# Altium PCB PCB1.PcbDoc
Units mil, origin at the board's own origin, x right, y up, seen from the top; angles counter-clockwise.
Board outline 2362.2 x 1574.8 mil, 2 copper layers (Top Layer, Bottom Layer); 17 components, 8 nets, 37 pads, 0 vias.
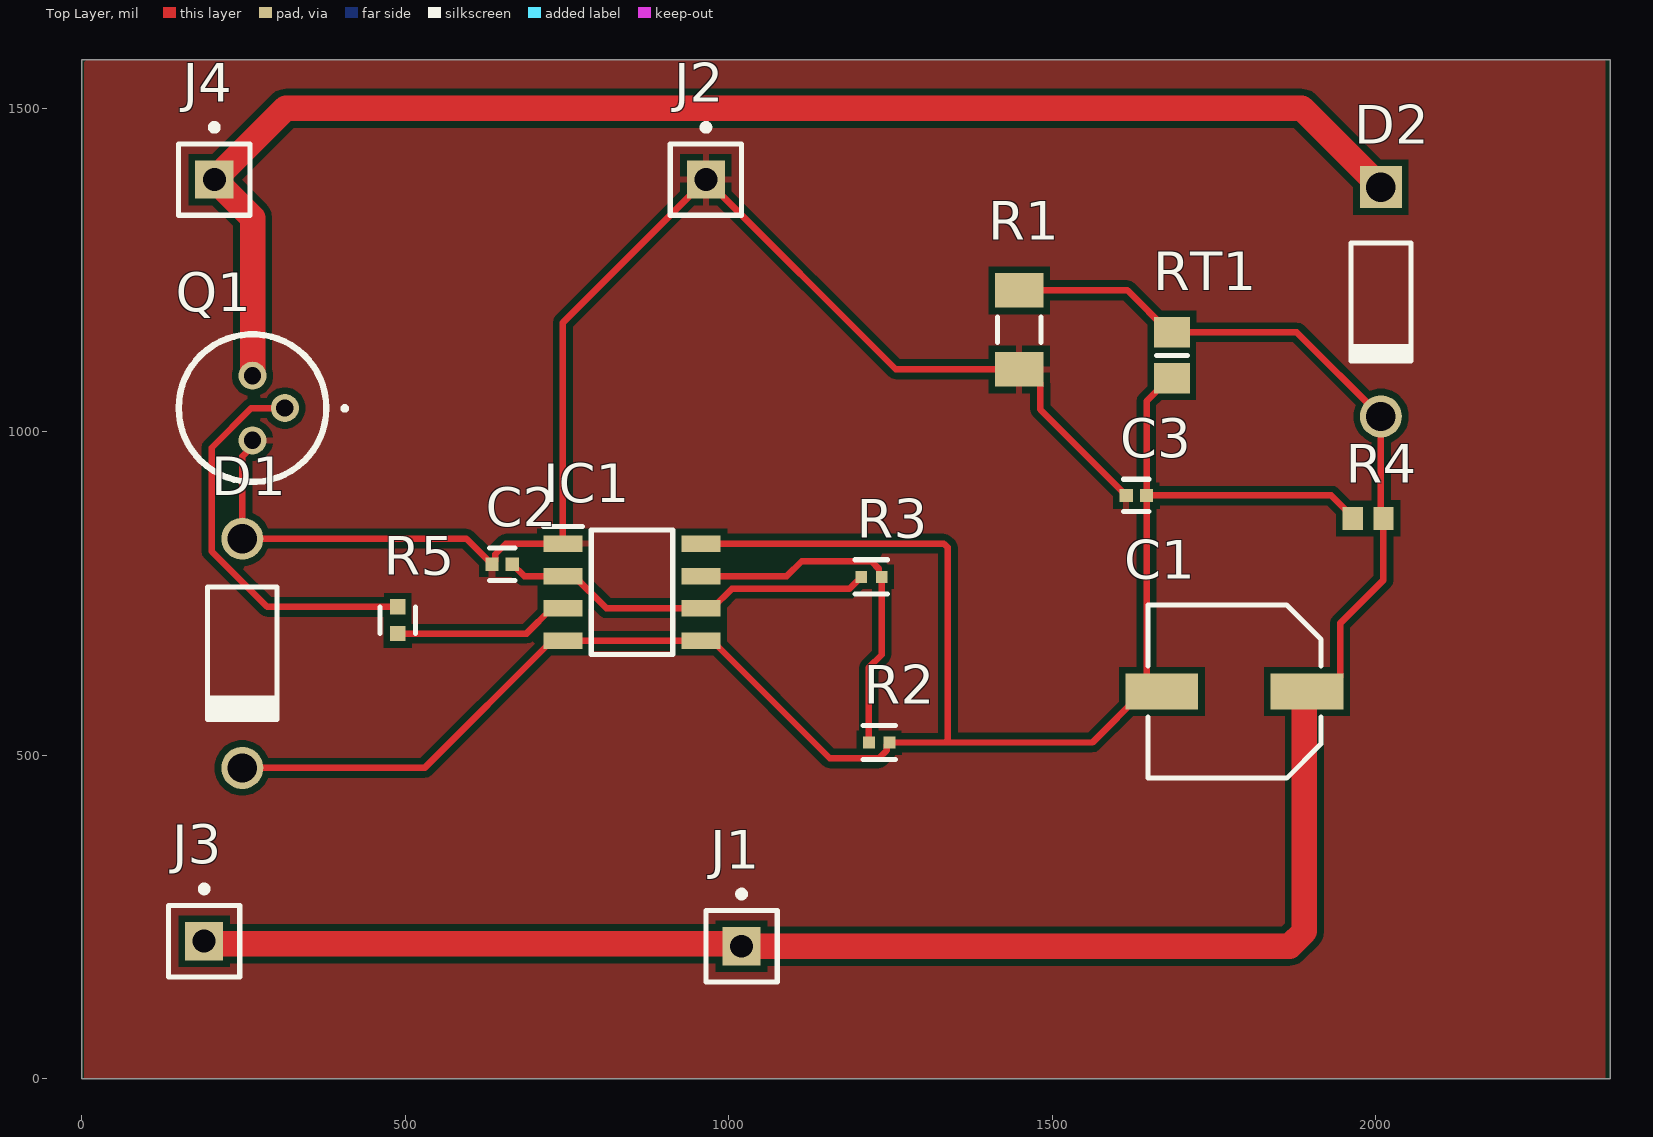
[diagram p0: Top Layer view]
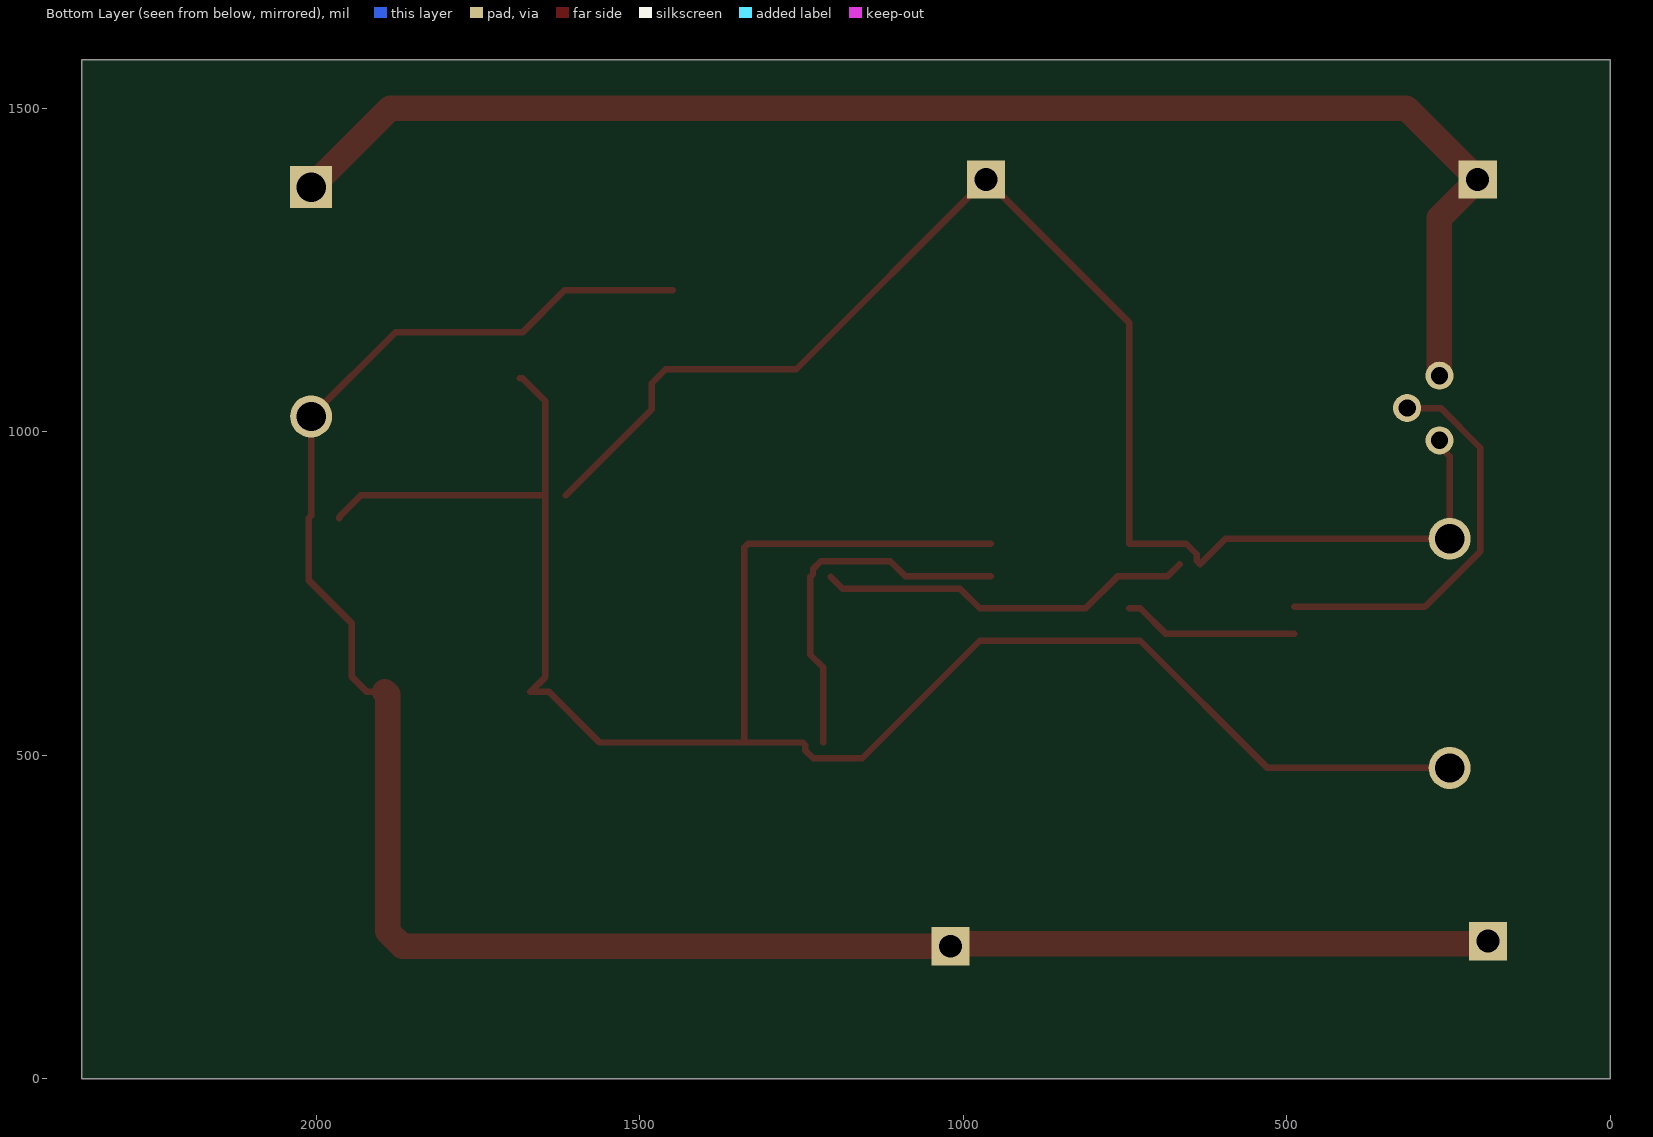
[diagram p1: Bottom Layer view, seen from below]
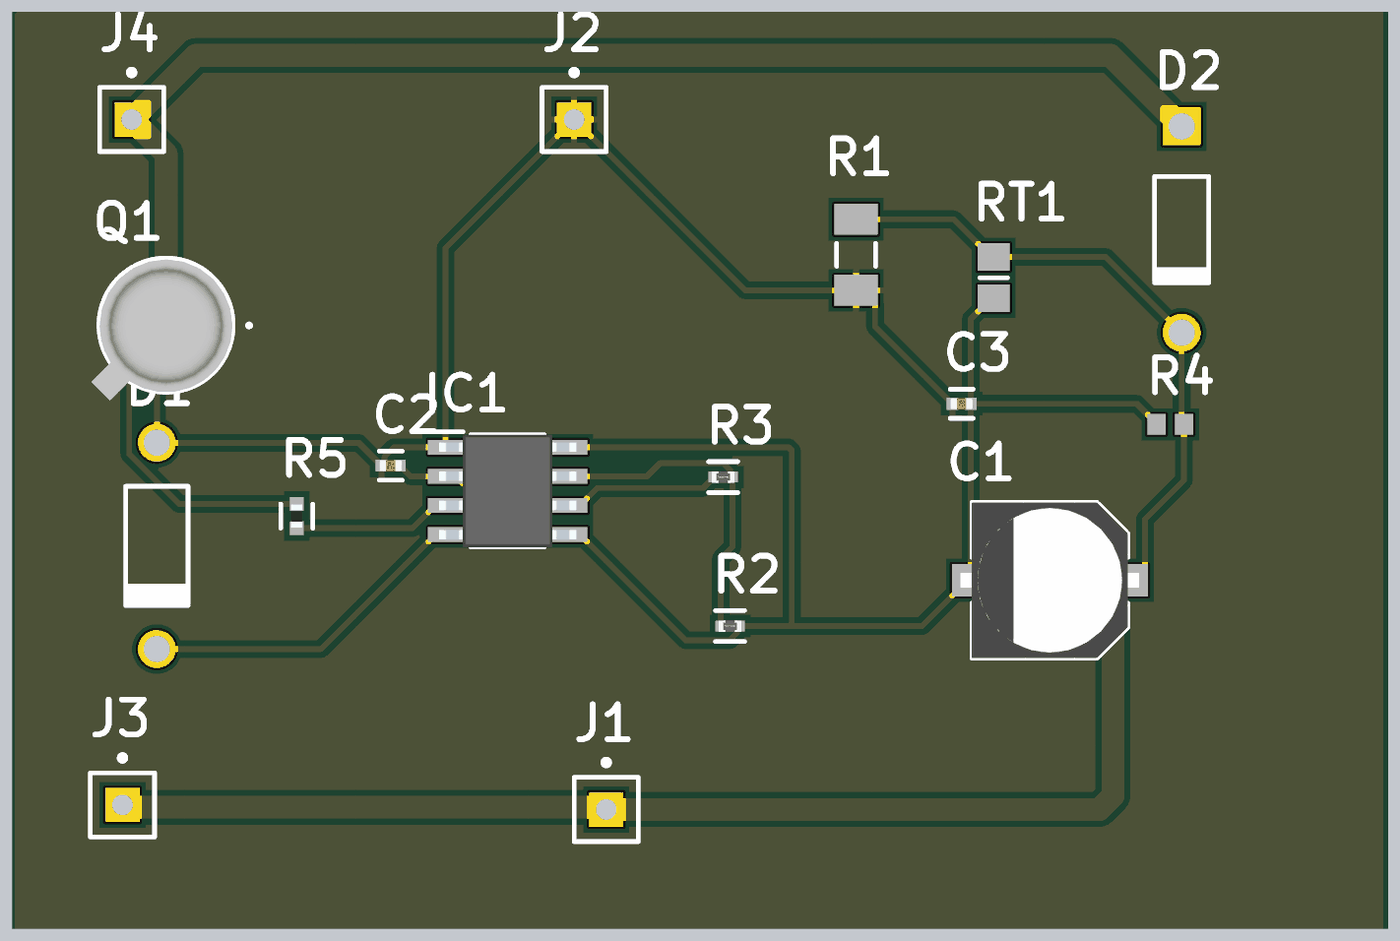
[diagram p2: 3D render of the assembled board from above, using the file's embedded part models]

## Layer stack, top to bottom
Top Solder: solder mask 0.4, Solder Resist, Dk 3.5
Top Layer: signal copper 1.4
Dielectric 1: dielectric 12.6, FR-4, Dk 4.8
Bottom Layer: signal copper 1.4
Bottom Solder: solder mask 0.4, Solder Resist, Dk 3.5

## Board outline
0,0 0,1574.8 2362.2,1574.8 2362.2,0

## Design rules (kind name [scope] priority, off if disabled: settings)
Clearance [All] p1: gap=10 ignorepadtopadclearanceinfootprint=FALSE except(0: Arc-Hole Track-Hole SMDPad-Hole THPad-Hole Via-Hole Fill-Hole Poly-Hole Region-Hole Text-Hole)
PolygonConnect [All] p1: connectstyle=Relief reliefconductorwidth=10 reliefentries=4 polygonreliefangle="90 Angle" airgapwidth=10
RoutingVias [All] p1: holewidth=23.62 width=39.37 viastyle="Through Hole" minholewidth=15.75 minwidth=27.56 maxholewidth=28 maxwidth=50
SolderMaskExpansion [All] p1: expansion=4 istentingtop=FALSE
Width [All] p1: maxlimit=39.37 minlimit=3.94 preferedwidth=10 minimp=50.000000 maximp=50.000000 favimp=50.000000
30 further rules are at their usual default settings.

## Components (designator, comment, footprint, x,y, rotation, side; value= is the part's Value field where it differs from the comment)
C1 "EEEFK1C101P" PNSC-EEEFK1C101P_L 1781.5,598.43 r180 top
C2 "C0402C473K4RACTU" FP-C0402-BB-MFG 649.61,795.28 r180 top value="47,000 pF"
C3 "C0402C473K4RACTU" FP-C0402-BB-MFG 1629.92,901.57 r180 top value="47,000 pF"
D1 "1N4739A" FAIR-DO-41-2_V 248.03,657.48 r270 top
D2 "1N4001-T" DIOD-DO-41-P-2_V 2007.87,1200.79 r270 top
IC1 "NE555D" SOIC127P600X175-8N 850.39,751.97 r0 top
J1 "Socket" PIN1 1019.69,204.72 r0 top
J2 "Socket" PIN1 964.57,1389.76 r0 top
J3 "Socket" PIN1 188.98,212.6 r0 top
J4 "Socket" PIN1 204.72,1389.76 r0 top
Q1 "2N2222A" TO-18_4 263.78,1036.61 r0 top
R1 "27K 1% 1206(3216)" RESC1206(3216)_M 1448.82,1157.48 r90 top value="27000.00 Ohm"
R2 "ERJ-2RKF1003X" FP-ERJ2RK-IPC_C 1232.28,519.68 r0 top
R3 "ERJ-2RKF1003X" FP-ERJ2RK-IPC_C 1220.47,775.59 r0 top
R4 "ERA3AEB102V" RESC1608X55X30LL20T20 1988.19,866.14 r180 top
R5 "CRCW040210K0FKED" FP-CRCW0402-e3-MFG 488.19,708.66 r90 top
RT1 "317-1258-ND" 6-0805_N 1685.04,1118.11 r90 top

## Footprints (in the part's own frame and the unit in brackets; to place one, negate y for a bottom-side part, rotate by r counter-clockwise, add the part's x,y. Pads: shape width x height; smd on the part's side, far side on the other; paste and mask are expansions set on the pad)
6-0805_N [mm] "Chip Resistor, Body 2.0x1.2mm, IPC Medium Density"
  rect 1.2x1.4 smd: 1(-0.9,0) 2(0.9,0)
  silkscreen extent 0,-0.6 0,0.6, body extent -1.07,-0.7 1.07,0.7, height 0.7
DIOD-DO-41-P-2_V [mm] "2-Leads, Axial Lead, Body 4.635x2.36mm, Pin Spacing 9mm"
  rect 1.65x1.65 hole 1.15: 1(-4.5,0)
  round 1.65 hole 1.15: 2(4.5,0)
  silkscreen extent -2.32,-1.18 2.32,1.18, body extent -4.93,-1.18 4.93,1.18, height 2.35
FAIR-DO-41-2_V [mm] "2-Leads, Axial leaded, Body 2.72x5.2mm, Pin Spacing 9mm"
  round 1.65 hole 1.15: 1(-4.5,0) 2(4.5,0)
  silkscreen extent -2.6,-1.36 2.6,1.36, body extent -4.93,-1.36 4.93,1.36, height 2.71
FP-C0402-BB-MFG [mm]
  rect 0.52x0.52 smd paste+0 mask+0: 1(-0.4,0) 2(0.4,0)
  silkscreen extent -0.5,-0.64 0.5,0.64, body extent -0.8,-0.4 0.8,0.4, height 0.25
FP-CRCW0402-e3-MFG [mm]
  rect 0.6x0.6 smd paste+0 mask+0: 1(-0.525,0) 2(0.525,0)
  silkscreen extent -0.53,-0.7 0.53,0.7, body extent -0.92,-0.4 0.92,0.4, height 0.25
FP-ERJ2RK-IPC_C [mil]
  rect 18.43x18.6 smd paste+0 mask+0: 1(-15.83,0) 2(15.83,0)
  silkscreen extent -25,-27 25,27, body extent -29,-15 29,15, height 10
PIN1 [mm] "Connector; Plug"
  rect 1.5x1.5 hole 0.9: 1(0,0)
  silkscreen extent -1.4,-1.4 1.4,2.17
PNSC-EEEFK1C101P_L [mm] "Aluminum Electrolytic Capacitor, Body 6.8x6.8mm, IPC High Density"
  rect 2.85x1.4 smd: 1(-2.85,0) 2(2.85,0)
  silkscreen extent -3.4,-3.4 3.4,3.4, body extent -3.9,-3.4 3.9,3.4, height 6.3
RESC1206(3216)_M [mm] "Chip Resistor, Body 3.2x1.6mm, IPC Low Density"
  rect 1.35x1.9 smd: 1(-1.55,0) 2(1.55,0)
  silkscreen extent -0.5,-0.85 0.5,0.85, body extent -1.67,-0.87 1.67,0.87, height 0.75
RESC1608X55X30LL20T20 [mm] "Chip Resistor, 2-Leads, Body 1.60x0.80mm, IPC High Density"
  rect 0.8x0.9 smd: 1(-0.6,0) 2(0.6,0)
  body extent -0.9,-0.5 0.9,0.5, height 0.55
SOIC127P600X175-8N [mm]
  rect 1.525x0.65 smd: 1(-2.712,1.905) 2(-2.712,0.635) 3(-2.712,-0.635) 4(-2.712,-1.905) 5(2.712,-1.905) 6(2.712,-0.635) 7(2.712,0.635) 8(2.712,1.905)
  silkscreen extent -3.47,-2.45 1.6,2.58, body extent -3,-2.45 3,2.45, height 1.75
TO-18_4 [mm]
  round 1.1 hole 0.68: 1(1.27,0) 2(0,1.27) 3(0,-1.27)
  silkscreen extent -2.9,-2.9 3.67,2.9, body extent -3.27,-3.3 2.9,2.87, height 6.4

## Part data
C1: library part CMP-2000-06203-1, "Aluminum Electrolytic Capacitor, 100 uF, 20%, 16 V, -55 to 105 degC, 2-Pin SMD, RoHS, Tape and Reel", Capacitance=100µF, Case Size/Dimension=Ø6.3x5.8mm, Lifetime@Temperature=2000Hrs@105°C, Manufacturer=Panasonic, Operating Temp Range=-55to+105°C, Operating Temp-Max=105°C, Package Description="2-Pin Surface Mount Device, Body 6.6 x 6.6 mm", Rated Voltage=16V, Ripple Current=240mA, Datasheet URL=http://datasheet.octopart.com/EEEFK1C101P-Panasonic-datasheet-13266987.pdf, Datasheet Version=11/2012, Impedance=0.36O, Manufacturer URL=http://www.panasonic.com/, Mounting Technology=SurfaceMount, Package Reference=EEEFK1C101P, Series=FK, Type=Can
C2 C3: library part CMP-2008-03221-2, "Cap Ceramic 0.047uF 16V X7R 10% SMD 0402 125°C Paper T/R", Capacitance="47,000 pF", Manufacturer=Kemet, Package=C0402-BB, Temperature="-55°C to +125°C", Temperature Characteristic=X7R, Temperature Coefficient=15%, Temperature Range High=+125°C, Temperature Range Low=-55°C, Tolerance=0.1, Voltage Rating="16 V", Automotive=No, Category=Cap, ComponentLink2Description=Datasheet, ComponentLink2URL=https://content.kemet.com/datasheets/KEM_C1002_X7R_SMD.pdf, Device Class L1="Passive Components", Device Class L2=Capacitors, Device Class L3="Ceramic Capacitors", Digikey Description="Cap Ceramic 0.047uF 16V X7R 10% SMD 0402 125°C Paper T/R", Height=0.55mm, Ipc Land Pattern Name=CAPC10050X50, Lead Free=Yes, Manufacturer Part Number=C0402C473K4RACTU, Material=Ceramic, Mouser Description="Multilayer Ceramic Capacitors MLCC - SMD/SMT 16volts 47000pF X7R 10%", Octopart=https://octopart.com/c0402c473k4ractu-kemet-145703, RoHS=TRUE
D1: library part CMP-0892-00007-1, "Zener Diode, 9.1V, 1W, 5%, -65 to 200 degC, 2-Pin DO-41, Body 2.72 x 5.2 mm, RoHS", Manufacturer="Fairchild Semiconductor", Operating and Storage Temperature Range="-65 to 200 degC", Test Current IZ (mA)=28, Tolerance=5%, ComponentLink1Description="Manufacturer URL", ComponentLink1URL=http://www.fairchildsemi.com/, ComponentLink2Description=Datasheet, ComponentLink2URL=http://www.fairchildsemi.com/ds/1N/1N4744A.pdf, ComponentLink3Description="Package Specification", ComponentLink3URL=http://www.fairchildsemi.com/dwg/DO/DO41A.pdf, DatasheetVersion="Rev. H3", IR (uA)=10, Mounting Technology="Through Hole", PackageDescription="2-Pin Axial leaded, Body 2.72 x 5.2 mm, Lead Spread 25.4 mm", PackageReference=DO-41-2, PackageVersion="Rev. 2", PartNumber=1N4739A, PD (W)=1, RoHS=TRUE, VZ (Max.) (V)=9.555, VZ (Min.) (V)=8.645, ZZ (Max) (ohm)=4.5
D2: library part CMP-0639-00006-2, "1.0 A Rectifier, 15 pF, 50 V, -65 to 150 degC, 2-Pin DO-41 Plastic, RoHS, Tape and Reel", Manufacturer="Diodes Inc", Max. Average Rectified Current IO (A)=1, Operating Temperature Range (degC)="-65 to 150", ComponentLink1Description="Manufacturer URL", ComponentLink1URL=http://diodes.com/, ComponentLink2Description=Datasheet, ComponentLink2URL=http://diodes.com/datasheets/ds28002.pdf, CT (pF)=15, DatasheetVersion="Rev. 8-2", Max. IFSM (A)=30, Max. IR (uA)=5, Mounting Technology="Through Hole", PackageDescription="2-Pin Axial Lead, Body 4.635 x 2.36 mm, Lead Spread 25.4 mm", PackageReference=DO-41-P-2, Packing="Tape and Reel", PartNumber=1N4001-T, RoHS=TRUE, VF (V)=1, VRRM (V)=50
IC1: "Integrated Circuit", Manufacturer_Name="Texas Instruments", Mouser Part Number=595-NE555D, Arrow Part Number=NE555D, Arrow Price/Stock=https://www.arrow.com/en/products/ne555d/texas-instruments?region=nac, Datasheet Link=http://www.ti.com/lit/ds/symlink/ne555.pdf, Height=1.75mm, Manufacturer_Part_Number=NE555D, Mouser Price/Stock=https://www.mouser.co.uk/ProductDetail/Texas-Instruments/NE555D?qs=gb35HGp1gQIV8t3Z88o0WA%3D%3D
Q1: "Transistor BJT NPN", Manufacturer_Name=STMicroelectronics, Mouser Part Number=511-2N2222A, Datasheet Link=http://docs-emea.rs-online.com/webdocs/0e77/0900766b80e779e1.pdf, Manufacturer_Part_Number=2N2222A, Mouser Price/Stock=https://www.mouser.co.uk/ProductDetail/STMicroelectronics/2N2222A?qs=UMEuL5FsraBzcgM1cdcH3A%3D%3D
R1: library part CMP-1014-00670-1, "27K 0.25W 1% 1206 (3216 Metric)  SMD", Case-EIA=1206, Case-Metric=3216, Power="0.25 W", Tolerance="1 %", Technology=SMT
R2 R3: library part CMP-2002-00608-4, "RES SMD 100K OHM 1% 1/10W 0402", Case Code (Imperial)=0402, Case Code (Metric)=1005, Max Operating Temperature=155°C, Max Power Dissipation=100mW, Min Operating Temperature=-55°C, Package Quantity=1, Resistance=100kR, Temperature Coefficient=100ppm/°C, Tolerance=1%, Voltage Rating=50V, Case/Package=0402, Composition="Thick Film", Contact Plating=Tin, Depth=0.5mm, Features="Automotive AEC-Q200", Height=0.35mm, Lead Free="Lead Free", Length=1mm, Military Standard=Not, Mount="Surface Mount", Number of Pins=2, Number of Terminations=2, Packaging="Tape and Reel", Power Rating=100mW, Radiation Hardening=No, REACH SVHC="No SVHC", Termination=SMD/SMT, Voltage Rating (DC)=50V, Width=0.5mm
R4: library part CMP-2000-00873-1, Manufacturer=Panasonic, Part Number=ERA3AEB102V
R5: library part CMP-2002-08135-2, "RES SMD 10K OHM 1% 1/16W 0402", Case Code (Imperial)=0402, Case Code (Metric)=1005, Max Operating Temperature=155°C, Max Power Dissipation=63mW, Min Operating Temperature=-55°C, Package Quantity=10, Resistance=10kR, Temperature Coefficient=100ppm/°C, Tolerance=1%, Voltage Rating=50V, Case/Package=0402, Composition="Thick Film", Contact Plating=Tin, Depth=0.5mm, Features="Automotive AEC-Q200", Height=0.35mm, Lead Free="Lead Free", Length=1mm, Military Standard=Not, Mount="Surface Mount", Number of Pins=2, Number of Terminations=2, Packaging="Tape and Reel", Power Rating=63mW, Radiation Hardening=No, Termination=SMD/SMT, Voltage Rating (DC)=50V, Weight=2.3E-05oz, Width=0.02inch
RT1: library part "Res Thermal", "THERMISTOR NTC 10KOHM 3470K BEAD", Manufacturer="Canadian Thermostats", Manufacturer Part Number=MF52A2103J3470, Max Operating Temperature=125°C, Max Power Dissipation=50mW, Min Operating Temperature=-55°C, Package Quantity=500, Tolerance=5%, Category=Thermistors, Code_IPC=RESC2012, ComponentLink1Description=https://datasheet.ciiva.com/2849/cantherm-mf52-1-2849107.pdf?src-supplier=Digi-Key, ComponentLink1URL=https://datasheet.ciiva.com/2849/cantherm-mf52-1-2849107.pdf?src-supplier=Digi-Key, LatestRevisionDate=29-May-2009, LatestRevisionNote="IPC-7351 Footprint Added.", Mount="Through Hole", PackageDescription="Chip Resistor 0805 Case Size", PackageReference=6-0805, PackageVersion=Mar-2003, Packaging=Bulk, Pricing 1="1=0,51000, 5=0,45600, 10=0,40500, 25=0,36280, 50=0,31880, 100=0,27170, 500=0,22468, 1000=0,18810, 5000=0,16720 (USD)", Published=24-Mar-1999, Publisher="Altium Limited", RoHS=Yes, Stock 1=24805, Supplier 1=Digi-Key, Supplier Part Number 1=317-1258-ND
J1 J2 J3 J4: LatestRevisionDate=17-Jul-2002, LatestRevisionNote="Re-released for DXP Platform.", Publisher="Altium Limited"

## Nets (pads, with @x,y where several pads share a name; then routed paths per layer and width w, separated by ;. In a path a pad name is that pad's centre, name@x,y a point inside that pad or via, vN(x,y) a via of type N, cw(c..) or ccw(c..) an arc to the next point about the centre after c; other vN are vias at no path point)
GND: C2.2 C3.2 D1.1 IC1.1 J2.1 Q1.3 R1.1 | length 2219.3
  Top Layer w10: Q1.3 263.78,977.6 248.03,961.85 D1.1 594.49,834.65 C2.2 639.09,800.51 639.09,810.7 655.36,826.97 IC1.1 743.62,1168.82 J2.1 1257.87,1096.46 R1.1 1459.65,1096.46 1481.22,1074.88 1481.22,1034.53 C3.2
NetC1_2: C1.2 C3.1 D1.2 IC1.4 IC1.5 IC1.8 R2.2 R4.2 RT1.1 | length 3158.9
  Top Layer w10: D1.2 529.74,480.31 726.4,676.97 IC1.4 IC1.5 974.39,676.97 1155.97,495.38 1231.88,495.38 1243.9,507.4 1243.9,515.47 R2.2 1334.65,519.68 ; IC1.8 1332.53,826.97 1338.39,821.11 1338.39,523.43 1334.65,519.68 ; C1.2 C1.2@1668.23,598.43 ; RT1.1 1681.1,1082.68 1645.67,1047.24 C3.1 ; R4.2 1964.57,868.11 1931.1,901.57 C3.1 ; 1334.65,519.68 1562.01,519.68 1640.75,598.43 C1.2@1668.23,598.43 ; C3.1 1645.67,620.98 C1.2@1668.23,598.43
NetC2_1: C2.1 IC1.2 IC1.6 R3.1 | length 587.8
  Top Layer w10: C2.1 683.66,776.97 IC1.2 760.85,776.97 810.85,726.97 IC1.6 974.39,726.97 1004.39,756.97 1186.1,756.97 1204.64,775.51 R3.1
NetD2_1: D2.1 J4.1 Q1.2 | length 2227
  Top Layer w39.37: Q1.2 263.78,1330.71 J4.1 314.96,1500 1885.83,1500 D2.1
NetIC1_3: IC1.3 R5.1 | length 271.6
  Top Layer w10: R5.1 687.42,687.99 726.4,726.97 IC1.3
NetIC1_7: IC1.7 R2.1 R3.2 | length 567.6
  Top Layer w10: IC1.7 1089.67,776.97 1112.59,799.89 1220.07,799.89 1232.09,787.87 1232.09,779.81 R3.2 1236.31,655.46 1216.45,635.6 R2.1
NetQ1_1: Q1.1 R5.2 | length 622
  Top Layer w10: Q1.1 261.94,1036.61 200.55,975.22 200.55,814.98 286.2,729.33 R5.2
VCC: C1.1 D2.2 J1.1 J3.1 R1.2 R4.1 RT1.2 | length 3218.1
  Top Layer w10: R1.2 1616.14,1218.5 1681.1,1153.54 RT1.2 1877.95,1153.54 D2.2 2007.87,870.08 R4.1 2011.81,770.71 1944.8,703.7 1944.8,620.98 1922.24,598.43 C1.1
  Top Layer w39.37: J3.1 192.91,208.66 1015.75,208.66 J1.1 1866.7,204.72 1889.76,227.79 1889.76,594.49 C1.1

## Polygon pours and split planes (outlines as drawn)
GND on Top Layer "GND_L01_P000" (solid, pour order 0): 3.94,1570.87 7.87,1574.8 2354.33,1574.8 2354.33,0 3.94,0